# EAGLE board Proiect-Open-Book (EAGLE 9.7.0)
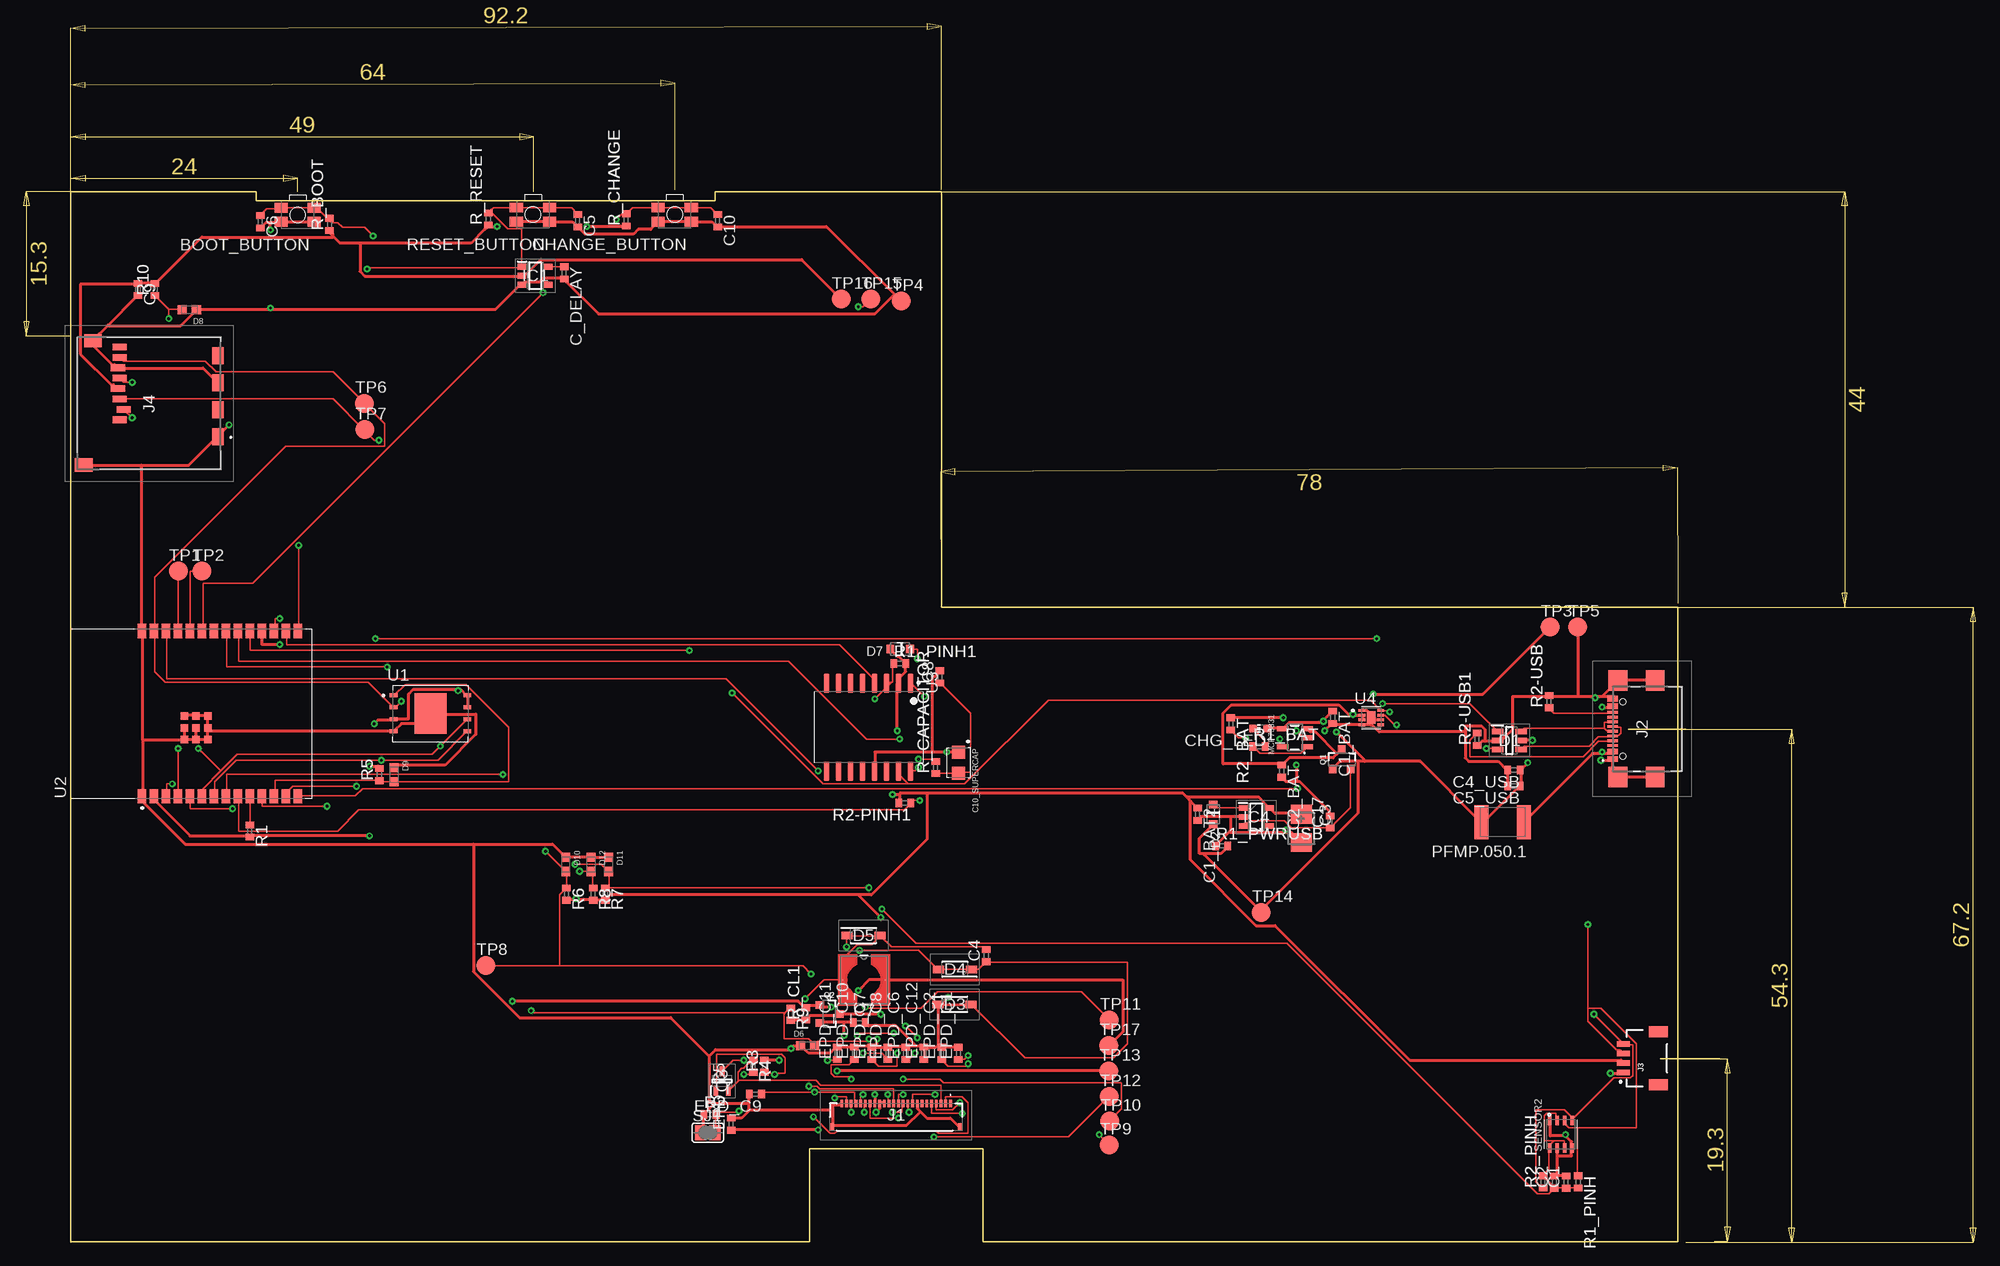
[diagram p0: board, top side]
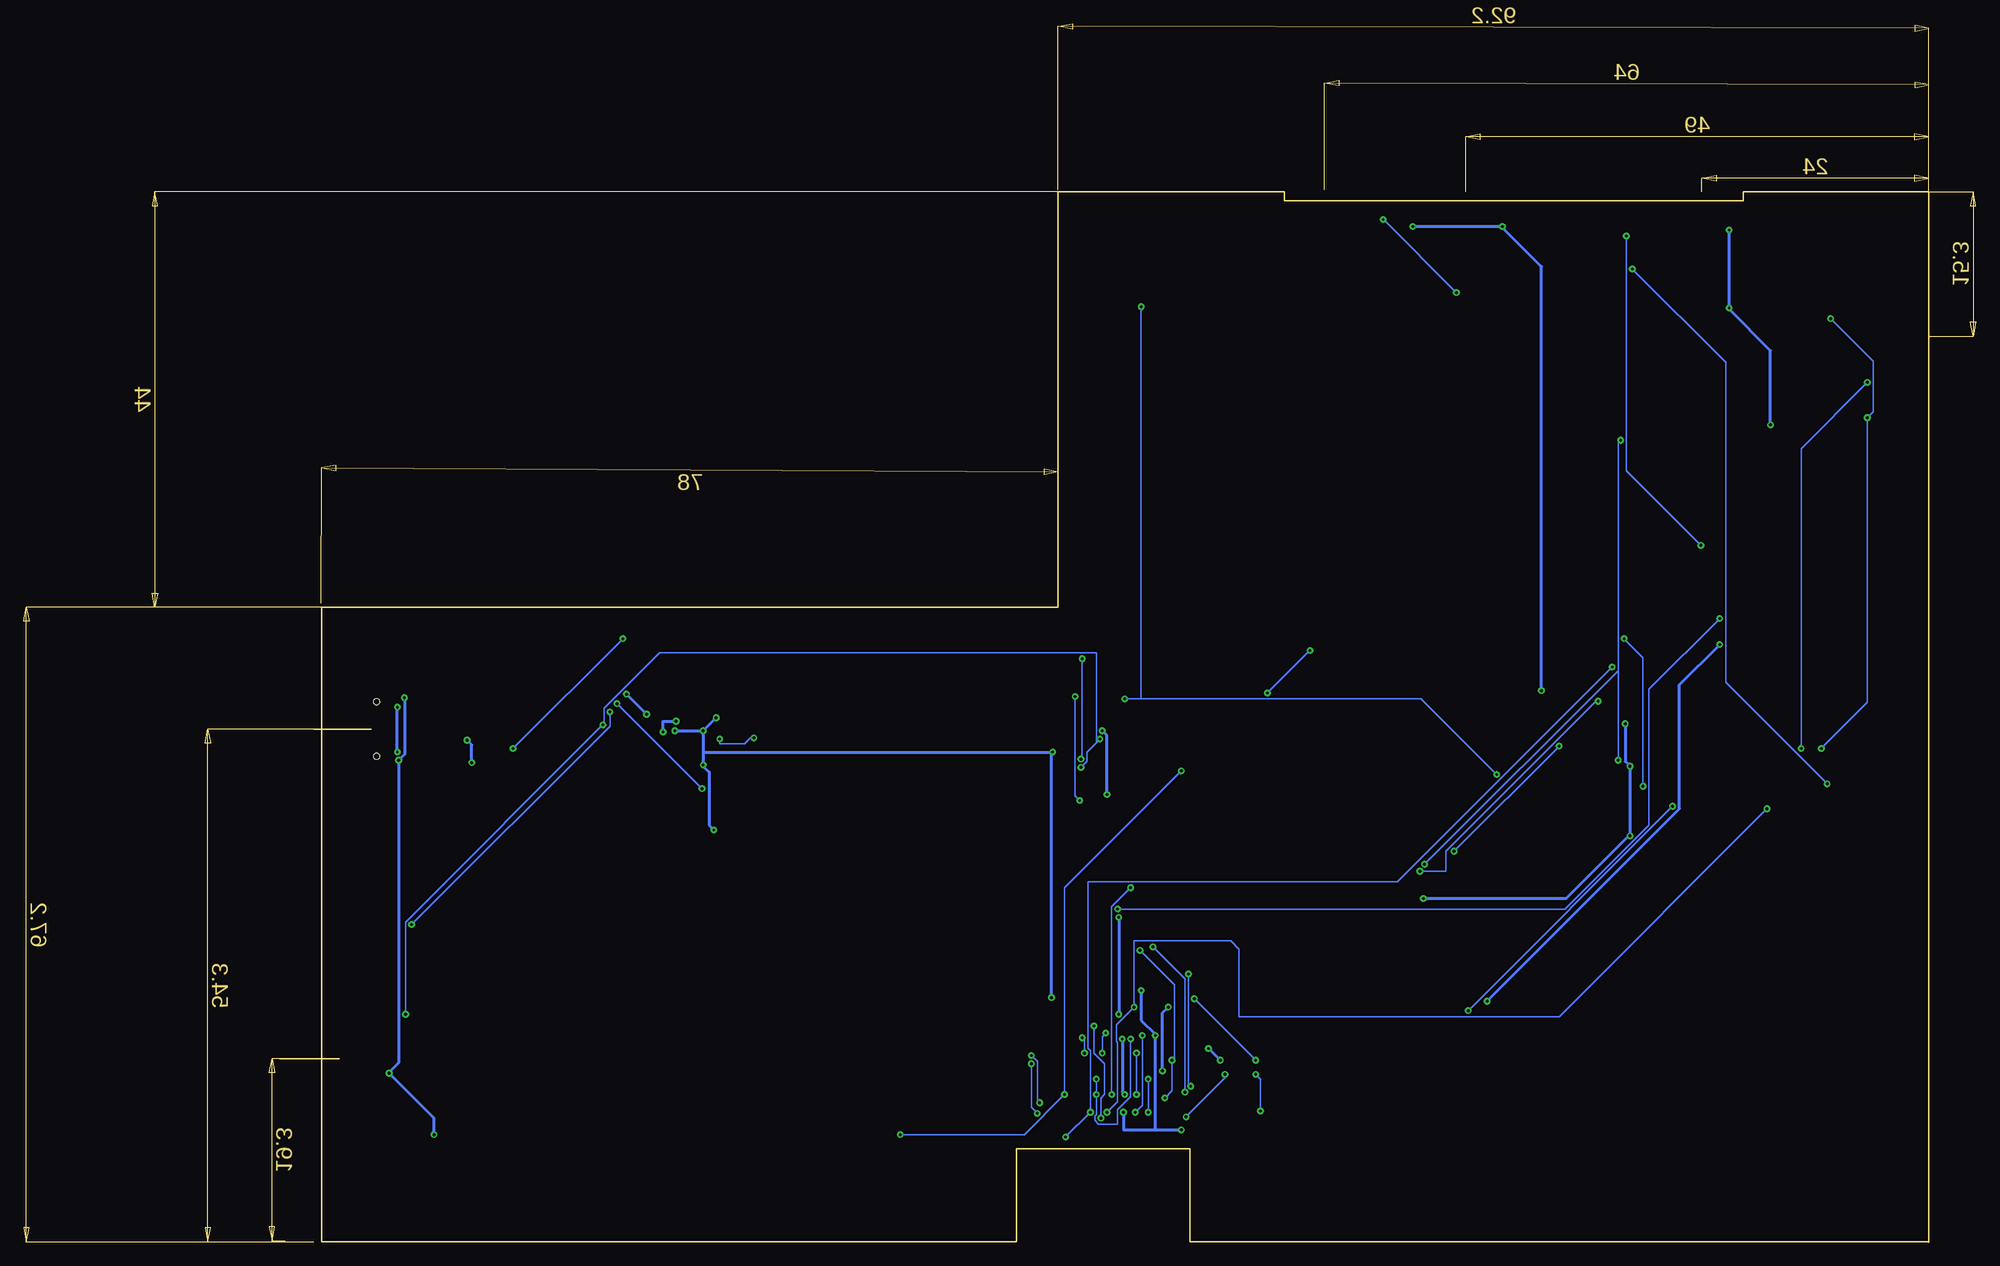
[diagram p1: board, bottom side, seen from below]

Size 174.6 x 111.2 mm. Coordinates in mm from the lower left corner, seen from the top.
Outline: 171,54.3 164.9,54.3
Outline: 174.6,19.4 168.3,19.4
Outline: 0,0 0,111.2 19.6,111.2 19.6,110.2 68.2,110.2 68.2,111.2 92.2,111.2 92.2,67.2 170.15,67.2 170.15,0.08 170.12,0.04 96.57,0.04 96.57,9.9 78.2,9.9 78.2,0.04 0.04,0.04 0,0
Copper layers (1*16): Top 0.035mm / dielectric 1.5mm / Bottom 0.035mm
Design rules "Fusion Electronics Design Rules *": minimum track width 6mil, minimum drill 0.3mm, track to track 6mil, track to pad 6mil, pad to pad 6mil, via to via 6mil, smd to smd 6mil, copper to edge 0.5mm, drill to drill 0.1mm, minimum pad ring 10mil, minimum via ring 8mil, stop-mask expansion 4mil, vias tented up to drill 0mil, thermal gap 10mil
Net classes: 0 default: width 0.15 mm; 1 Trasee Alimentare: width 0.3 mm

## Footprints (pad centres in the part's own frame; a part is rotated, then mirrored left to right if it is on the bottom)
MYBUTTON = smd 1.4 x 1.05: 1 1.75,0.75; 2 -1.75,0.75; 3 -1.75,-0.75; 4 1.75,-0.75
EAGLE-LTSPICE_C0402 = smd 0.7 x 0.9: 1 -0.65,0; 2 0.65,0
RCL_CT3528 = smd 2 x 2.2: + -1.5,0; - 1.5,0
CAPCP3225X100N = smd 1.4 x 1.4: 1 -1.1,0; 2 1.1,0
ADAFRUIT_CHIP-LED0603 = smd 0.8 x 0.8: A 0,-0.75; C 0,0.75
SOT95P280X145-6N = smd 1.2 x 0.6: 1 -1.25,0.95; 2 -1.25,0; 3 -1.25,-0.95; 4 1.25,-0.95; 5 1.25,0; 6 1.25,0.95
ESP32_WROVER_AVX---SD0805S020S1R0_AVX_SD0805S020S1R0_0 = smd 0.8 x 0.9: 1 -1.05,0; 2 1.05,0
SOD3716X135N = smd 1.15 x 0.8: 1 -1.75,0; 2 1.75,0
DIOC1608X36N = smd 0.97 x 0.94: 1 -0.75,0; 2 0.75,0
SOT95P280X125-5N = smd 0.9 x 0.6: 1 -1.4,0.95; 2 -1.4,0; 3 -1.4,-0.95; 4 1.4,-0.95; 5 1.4,0.95
SOT95P280X120-5N = smd 0.9 x 0.6: 1 -1.4,0.95; 2 -1.4,0; 3 -1.4,-0.95; 4 1.4,-0.95; 5 1.4,0.95
FH34SRJ24S05SH99 = smd 0.3 x 0.8: 1 5.75,1.45; 2 5.25,1.45; 3 4.75,1.45; 4 4.25,1.45; 5 3.75,1.45; 6 3.25,1.45; 7 2.75,1.45; 8 2.25,1.45; 9 1.75,1.45; 10 1.25,1.45; 11 0.75,1.45; 12 0.25,1.45; 13 -0.25,1.45; 14 -0.75,1.45; 15 -1.25,1.45; 16 -1.75,1.45; 17 -2.25,1.45; 18 -2.75,1.45; 19 -3.25,1.45; 20 -3.75,1.45; 21 -4.25,1.45; 22 -4.75,1.45; 23 -5.25,1.45; 24 -5.75,1.45 | smd 0.4 x 0.8: MP1 6.75,-1.05; MP2 -6.75,-1.05
SAMACSYS_PARTS_USB4110GFA = smd 0.3 x 1.15: A1 -3.35,3.678; A4 -2.55,3.678; A5 -1.25,3.678; A6 -0.25,3.678; A7 0.25,3.678; A8 1.25,3.678; A9 2.55,3.678; A12 3.35,3.678; B1 3.05,3.678; B4 2.25,3.678; B5 1.75,3.678; B6 0.75,3.678; B7 -0.75,3.678; B8 -1.75,3.678; B9 -2.25,3.678; B12 -3.05,3.678 | smd 2.18 x 2: MP1 -5.11,-0.827; MP2 5.11,-0.827; MP3 -5.11,3.103; MP4 5.11,3.103 | hole 0.65: -2.89,2.603; 2.89,2.603
JST04_1MM_RA = smd 0.6 x 1.35: 1 -1.5,0; 2 -0.5,0; 3 0.5,0; 4 1.5,0 | smd 1.2 x 2: NC1 2.8,-3.675; NC2 -2.8,-3.675
112ATAARR03ATTEND = smd 1.8 x 1.2: G1 10.6,10.4; G2 4.9,10.4; S1 7.75,10.4; S2 2.05,10.4 | smd 1.4 x 1.9: G3 13.6,-3.85; G4 0.45,-2.85 | smd 0.7 x 1.5: P1 8.8,0; P2 7.7,0.4; P3 6.6,0; P4 5.5,-0.2; P5 4.4,0; P6 3.3,-0.2; P7 2.2,0; P8 1.1,0
IND_4828-WE-TPC_WRE = smd 0.127 x 0.127: 1 -2.286,0; 2 2.286,0
ESP32_WROVER_SPARKFUN-IC-POWER_SOT23-5 = smd 0.55 x 1.2: 1 -0.95,-1.3; 2 0,-1.3; 3 0.95,-1.3; 4 0.95,1.3; 5 -0.95,1.3
ESP32C6_VARISTOR_CT/CN1812 = smd 1.5 x 3.6: 1 -2.25,0; 2 2.25,0
ESP32_WROVER_SPARKFUN-DISCRETESEMI_SOT23-3 = smd 0.8 x 0.9: 1 -0.95,-1; 2 0.95,-1; 3 0,1.1
SOT65P210X110-3N = smd 1.05 x 0.5: 1 -1.05,0.65; 2 -1.05,-0.65; 3 1.05,0
ESP32_WROVER_EAGLE-LTSPICE_R0402 = smd 0.7 x 0.9: 1 -0.65,0; 2 0.65,0
ESP32_WROVER_BME680_PSON80P300X300X100-8N = smd 1.016 x 0.5: 1 1.458,1.2; 2 1.458,0.4; 3 1.458,-0.4; 4 1.458,-1.2; 5 -1.458,-1.22; 6 -1.458,-0.4; 7 -1.458,0.4; 8 -1.458,1.2
SJ = smd 1.168 x 1.6: 1 -0.762,0; 2 0.762,0
TP20R = smd 2 x 2: TP 0,0
SON127P600X800X80-9N = smd 0.94 x 0.44: 1 -3.895,1.905; 2 -3.895,0.635; 3 -3.895,-0.635; 4 -3.895,-1.905; 5 3.895,-1.905; 6 3.895,-0.635; 7 3.895,0.635; 8 3.895,1.905 | smd 3.4 x 4.3: 9 0,0
XCVR_ESP32-C6-WROOM-1-N8 = smd 1.5 x 0.9: 1 -8.75,5.26; 2 -8.75,3.99; 3 -8.75,2.72; 4 -8.75,1.45; 5 -8.75,0.18; 6 -8.75,-1.09; 7 -8.75,-2.36; 8 -8.75,-3.63; 9 -8.75,-4.9; 10 -8.75,-6.17; 11 -8.75,-7.44; 12 -8.75,-8.71; 13 -8.75,-9.98; 14 -8.75,-11.25; 15 8.75,-11.25; 16 8.75,-9.98; 17 8.75,-8.71; 18 8.75,-7.44; 19 8.75,-6.17; 20 8.75,-4.9; 21 8.75,-3.63; 22 8.75,-2.36; 23 8.75,-1.09; 24 8.75,0.18; 25 8.75,1.45; 26 8.75,2.72; 27 8.75,3.99; 28 8.75,5.26 | smd 0.8 x 0.8: 29_1 -2.755,0.79; 29_2 -1.505,0.79; 29_3 -0.255,0.79; 29_4 -2.755,-0.46; 29_5 -1.505,-0.46; 29_6 -0.255,-0.46; 29_7 -2.755,-1.71; 29_8 -1.505,-1.71; 29_9 -0.255,-1.71
SOIC127P1032X265-16N = smd 2.05 x 0.59: 1 -4.655,4.445; 2 -4.655,3.175; 3 -4.655,1.905; 4 -4.655,0.635; 5 -4.655,-0.635; 6 -4.655,-1.905; 7 -4.655,-3.175; 8 -4.655,-4.445; 9 4.655,-4.445; 10 4.655,-3.175; 11 4.655,-1.905; 12 4.655,-0.635; 13 4.655,0.635; 14 4.655,1.905; 15 4.655,3.175; 16 4.655,4.445
SON50P200X200X80-9N = smd 0.76 x 0.27: 1 -0.985,0.75; 2 -0.985,0.25; 3 -0.985,-0.25; 4 -0.985,-0.75; 5 0.985,-0.75; 6 0.985,-0.25; 7 0.985,0.25; 8 0.985,0.75 | smd 0.9 x 1.3: 9 0,0

## Placement (x,y rotation side)
BOOT_BUTTON  BUTTON_CUSYOMV1  [MYBUTTON]  24.02,108.73 180 top
C1  100nF  [EAGLE-LTSPICE_C0402]  158.29,6.35 90 top
C1_BAT  4.7uF  [EAGLE-LTSPICE_C0402]  133.59,55.55 270 top
C1_BAT2  4.7uF  [EAGLE-LTSPICE_C0402]  119.29,45.29 270 top
C2  100nF  [EAGLE-LTSPICE_C0402]  157.07,6.35 90 top
C2_BAT  4.7uF  [EAGLE-LTSPICE_C0402]  128.2,49.85 270 top
C3  100uF  [RCL_CT3528]  130.29,43.8 270 top
C4  4.7uF  [EAGLE-LTSPICE_C0402]  96.93,30.33 90 top
C4_USB  [EAGLE-LTSPICE_C0402]  152.78,49.97 180 top
C5  1uF  [EAGLE-LTSPICE_C0402]  53.66,108.11 270 top
C5_USB  [EAGLE-LTSPICE_C0402]  152.79,48.27 180 top
C6  100nF  [EAGLE-LTSPICE_C0402]  20.05,108.01 270 top
C7  10uF  [EAGLE-LTSPICE_C0402]  83.48,23.23 0 top
C8  100nF  [EAGLE-LTSPICE_C0402]  92.02,59.83 90 top
C9  100nF  [EAGLE-LTSPICE_C0402]  7.1,100.83 270 top
C10  100nF  [EAGLE-LTSPICE_C0402]  68.48,108.11 270 top
C10_SUPERCAP  CPH3225A  [CAPCP3225X100N]  93.99,50.74 270 top
C17  [EAGLE-LTSPICE_C0402]  133.31,44.47 90 top
C_DELAY  100nF  [EAGLE-LTSPICE_C0402]  52.23,102.59 270 top
CHANGE_BUTTON  BUTTON_CUSYOMV1  [MYBUTTON]  63.94,108.76 180 top
CHG_LED  [ADAFRUIT_CHIP-LED0603]  125.94,54.35 90 top
D1  USBLC6-2SC6Y  [SOT95P280X145-6N]  152.3,53.09 0 top
D2  ESP32_WROVER_AVX---SD0805S020S1R0_AVX_SD0805S020S1R0_0_0AVX_SD0805S020S1R0_0_0  [ESP32_WROVER_AVX---SD0805S020S1R0_AVX_SD0805S020S1R0_0]  120.95,45.28 270 top
D3  MBR0530  [SOD3716X135N]  93.56,25.17 0 top
D4  MBR0530  [SOD3716X135N]  93.6,28.87 180 top
D5  MBR0530  [SOD3716X135N]  83.92,32.45 0 top
D6  PGB1010603MR  [DIOC1608X36N]  78,20.79 0 top
D7  ESP32_WROVER_AVX---SD0805S020S1R0_AVX_SD0805S020S1R0_0_0AVX_SD0805S020S1R0_0_0  [ESP32_WROVER_AVX---SD0805S020S1R0_AVX_SD0805S020S1R0_0]  87.8,62.78 180 top
D8  PGB1010603MR  [DIOC1608X36N]  12.55,98.67 180 top
D9  PGB1010603MR  [DIOC1608X36N]  34.23,49.47 270 top
D10  PGB1010603MR  [DIOC1608X36N]  52.41,39.97 270 top
D11  PGB1010603MR  [DIOC1608X36N]  56.93,39.97 270 top
D12  PGB1010603MR  [DIOC1608X36N]  55.07,39.97 270 top
EPD_C1  1uF/50V  [EAGLE-LTSPICE_C0402]  93.98,19.97 90 top
EPD_C2  1uF/50V  [EAGLE-LTSPICE_C0402]  92.19,19.97 90 top
EPD_C5  0.1uF/50V  [EAGLE-LTSPICE_C0402]  69.91,12.49 90 top
EPD_C6  1uF/50V  [EAGLE-LTSPICE_C0402]  88.4,19.97 90 top
EPD_C7  1uF/50V  [EAGLE-LTSPICE_C0402]  84.81,19.97 90 top
EPD_C8  1uF/50V  [EAGLE-LTSPICE_C0402]  86.52,19.97 90 top
EPD_C9  1uF/50V  [EAGLE-LTSPICE_C0402]  72.48,15.65 180 top
EPD_C10  1uF/50V  [EAGLE-LTSPICE_C0402]  82.97,19.99 90 top
EPD_C11  1uF/50V  [EAGLE-LTSPICE_C0402]  81.15,19.99 90 top
EPD_C12  1uF/50V  [EAGLE-LTSPICE_C0402]  90.31,19.99 90 top
IC1  BD5229G-TR  [SOT95P280X125-5N]  49.17,102.29 0 top
IC4  XC6220A331MR-G  [SOT95P280X120-5N]  125.51,44.99 0 top
J1  FH34SRJ-24S-0.5SH_99_  [FH34SRJ24S05SH99]  87.37,13.24 0 top
J2  SAMACSYS_PARTS_USB4110-GF-A  [SAMACSYS_PARTS_USB4110GFA]  166.91,54.32 90 top
J3  QWIIC_RIGHT_ANGLE  [JST04_1MM_RA]  164.39,19.46 90 top
J4  112A-TAAR-R03_ATTEND  [112ATAARR03ATTEND]  5.19,95.85 270 top
L1  68uH  [IND_4828-WE-TPC_WRE]  83.97,27.75 0 top
MCP73831  ESP32_WROVER_SPARKFUN-IC-POWER_MCP73831  [ESP32_WROVER_SPARKFUN-IC-POWER_SOT23-5]  129.59,53.39 90 top
PFMP.050.1  ESP32C6_VARISTORCN1812  [ESP32C6_VARISTOR_CT/CN1812]  151.6,44.46 180 top
Q1  20V/4.2A/52mΩ/1.4W  [ESP32_WROVER_SPARKFUN-DISCRETESEMI_SOT23-3]  134.56,51.06 0 top
Q2  20V/4.2A/52mΩ/1.4W  [ESP32_WROVER_SPARKFUN-DISCRETESEMI_SOT23-3]  80.28,24.16 270 top
Q3  SI1308EDL-T1-GE3  [SOT65P210X110-3N]  68.95,17.05 90 top
R1  2K  [ESP32_WROVER_EAGLE-LTSPICE_R0402]  18.95,43.51 270 top
R1_BAT  200  [ESP32_WROVER_EAGLE-LTSPICE_R0402]  125.81,52.45 0 top
R1_PINH  10K  [ESP32_WROVER_EAGLE-LTSPICE_R0402]  159.58,6.37 270 top
R1_PINH1  10K  [ESP32_WROVER_EAGLE-LTSPICE_R0402]  87.76,61.24 0 top
R1_PWRUSB  100K  [ESP32_WROVER_EAGLE-LTSPICE_R0402]  121.85,41.94 0 top
R2  2.2  [ESP32_WROVER_EAGLE-LTSPICE_R0402]  67.66,13.51 0 top
R2-PINH1  10K  [ESP32_WROVER_EAGLE-LTSPICE_R0402]  88.29,46.49 180 top
R2-USB  5k1  [ESP32_WROVER_EAGLE-LTSPICE_R0402]  156.49,57.21 90 top
R2-USB1  5K1  [ESP32_WROVER_EAGLE-LTSPICE_R0402]  148.88,53.23 90 top
R2_BAT  2K  [ESP32_WROVER_EAGLE-LTSPICE_R0402]  122.82,54.85 270 top
R2_PINH  10K  [ESP32_WROVER_EAGLE-LTSPICE_R0402]  155.86,6.37 90 top
R3  10K  [ESP32_WROVER_EAGLE-LTSPICE_R0402]  73.44,18.63 90 top
R4  0.47  [ESP32_WROVER_EAGLE-LTSPICE_R0402]  72.24,18.63 270 top
R5  10K  [ESP32_WROVER_EAGLE-LTSPICE_R0402]  32.66,49.48 90 top
R6  10K  [ESP32_WROVER_EAGLE-LTSPICE_R0402]  52.48,36.83 270 top
R7  10K  [ESP32_WROVER_EAGLE-LTSPICE_R0402]  56.6,36.83 270 top
R8  10K  [ESP32_WROVER_EAGLE-LTSPICE_R0402]  55.3,36.83 270 top
R9  10K  [ESP32_WROVER_EAGLE-LTSPICE_R0402]  76.21,24.13 270 top
R10  10K  [ESP32_WROVER_EAGLE-LTSPICE_R0402]  8.92,100.83 90 top
R_BOOT  10k  [ESP32_WROVER_EAGLE-LTSPICE_R0402]  27.4,107.72 90 top
R_CAPACITOR  15  [ESP32_WROVER_EAGLE-LTSPICE_R0402]  91.55,50.24 90 top
R_CHANGE  10k  [ESP32_WROVER_EAGLE-LTSPICE_R0402]  58.8,108.2 90 top
R_CL1  10K  [ESP32_WROVER_EAGLE-LTSPICE_R0402]  77.81,24.15 90 top
R_RESET  10k  [ESP32_WROVER_EAGLE-LTSPICE_R0402]  44.2,108.3 90 top
RESET_BUTTON  BUTTON_CUSYOMV1  [MYBUTTON]  48.93,108.76 180 top
SENSOR2  ESP32_WROVER_BME680_BME680  [ESP32_WROVER_BME680_PSON80P300X300X100-8N]  157.75,11.42 90 top
SJ1  [SJ]  67.44,11.59 0 top
TP1  TPTP20R  [TP20R]  11.37,71.01 0 top
TP2  TPTP20R  [TP20R]  13.89,71.01 0 top
TP3  TPTP20R  [TP20R]  156.61,65.11 0 top
TP4  TPTP20R  [TP20R]  87.93,99.61 0 top
TP5  TPTP20R  [TP20R]  159.55,65.11 0 top
TP6  TPTP20R  [TP20R]  31.09,88.79 0 top
TP7  TPTP20R  [TP20R]  31.11,85.99 0 top
TP8  TPTP20R  [TP20R]  43.93,29.29 0 top
TP9  TPTP20R  [TP20R]  109.95,10.29 0 top
TP10  TPTP20R  [TP20R]  110,12.81 0 top
TP11  TPTP20R  [TP20R]  109.95,23.51 0 top
TP12  TPTP20R  [TP20R]  109.95,15.41 0 top
TP13  TPTP20R  [TP20R]  109.9,18.11 0 top
TP14  TPTP20R  [TP20R]  126.05,34.91 0 top
TP15  TPTP20R  [TP20R]  84.7,99.81 0 top
TP16  TPTP20R  [TP20R]  81.55,99.81 0 top
TP17  TPTP20R  [TP20R]  109.9,20.81 0 top
U1  W25Q512JVEIQ  [SON127P600X800X80-9N]  38.09,55.96 0 top
U2  ESP32-C6-WROOM-1-N8  [XCVR_ESP32-C6-WROOM-1-N8]  12.8,55.94 90 top
U3  DS3231SN#  [SOIC127P1032X265-16N]  84.45,54.5 270 top
U4  MAX17048G+T10  [SON50P200X200X80-9N]  137.68,55.52 0 top

## Library data of the parts
BOOT_BUTTON C1 C1_BAT C1_BAT2 C2 C2_BAT C4 C4_USB C5 C5_USB C6-C10 C17 C_DELAY CHANGE_BUTTON CHG_LED D3-D6 D8-D12 EPD_C1 EPD_C2 EPD_C5-EPD_C12 PFMP.050.1 R1 R1_BAT R1_PINH R1_PINH1 R1_PWRUSB R2 R2-PINH1 R2-USB R2-USB1 R2_BAT R2_PINH R3-R10 R_BOOT R_CAPACITOR R_CHANGE R_CL1 R_RESET RESET_BUTTON SJ1 TP1-TP17 = DeskAssistant v19 v1
C3 = DeskAssistant v19 v1; SPICEPREFIX: C
C10_SUPERCAP = DeskAssistant v19 v1; AVAILABILITY: Not in stock; CHECK_PRICES: https://www.snapeda.com/parts/CPH3225A/Seiko+Instruments/view-part/?ref=eda; DESCRIPTION: 11 mF (EDLC) Supercapacitor 3.3 V 1210 (3225 Metric) - -; MF: Seiko Instruments; MP: CPH3225A; PACKAGE: 1210 Seiko; PRICE: None; PURCHASE-URL: https://www.snapeda.com/api/url_track_click_mouser/?unipart_id=562593&manufacturer=Seiko Instruments&part_name=CPH3225A&search_term=None; SNAPEDA_LINK: https://www.snapeda.com/parts/CPH3225A/Seiko+Instruments/view-part/?ref=snap
D1 = DeskAssistant v19 v1; AVAILABILITY: In Stock; CHECK_PRICES: https://www.snapeda.com/parts/USBLC6-2SC6Y/STMicroelectronics/view-part/?ref=eda; DESCRIPTION: 17V Clamp 5A (8/20µs) Ipp Tvs Diode Surface Mount SOT-23-6; MF: STMicroelectronics; MP: USBLC6-2SC6Y; PACKAGE: SOT-23-6 STMicroelectronics; PRICE: None; SNAPEDA_LINK: https://www.snapeda.com/parts/USBLC6-2SC6Y/STMicroelectronics/view-part/?ref=snap
D2 D7 = DeskAssistant v19 v1; CENTROID_NOT_SPECIFIED: No; DATASHEET: http://datasheets.avx.com/schottky.pdf; DIGIKEY_DESCRIPTION: DIODE SCHOTTKY 20V 1A 0805; DIGIKEY_PART_NUMBER: 478-7800-1-ND; LEAD_FREE: yes; MF: AVX; MOUSER_PART_NUMBER: 581-SD0805S020S1R0; PACKAGE: 0805 (2012 metric); PREFIX: D; ROHS: yes; TEMPERATURE_RANGE_HIGH: +125°C; TEMPERATURE_RANGE_LOW: -55°C
IC1 = DeskAssistant v19 v1; DESCRIPTION: Voltage Detector with Adjustable Delay Time: CMOS processes are utilized to develop high precision, low current consumption CMOS reset ICs that allow arbitrary setting of the delay time. The extensive lineup includes both Nch Open Drain and CMOS output types in a wide range of detection voltages (from 2.3V to 6.0V, in 0.1V steps), enabling selection of the ideal solution based on customer requirements. In addition, the entire series is of course both lead-free and RoHS-compliant.; HEIGHT: 1.25mm; MANUFACTURER_NAME: ROHM Semiconductor; MANUFACTURER_PART_NUMBER: BD5229G-TR; MOUSER_PART_NUMBER: 755-BD5229G-TR; MOUSER_PRICE-STOCK: https://www.mouser.co.uk/ProductDetail/ROHM-Semiconductor/BD5229G-TR?qs=4kLU8WoGk0vvnhrrYwdszw%3D%3D
IC4 = DeskAssistant v19 v1; DESCRIPTION: LDO Voltage Regulators; HEIGHT: 1.2mm; MANUFACTURER_NAME: Torex; MANUFACTURER_PART_NUMBER: XC6220A331MR-G; MOUSER_PART_NUMBER: 865-XC6220A331MR-G; MOUSER_PRICE-STOCK: https://www.mouser.co.uk/ProductDetail/Torex-Semiconductor/XC6220A331MR-G?qs=AsjdqWjXhJ8ZSWznL1J0gg%3D%3D
J1 = DeskAssistant v19 v1; DESCRIPTION: 24 Position FFC, FPC Connector Contacts, Top and Bottom 0.020" (0.50mm) Surface Mount, Right Angle; HEIGHT: 1.1mm; MANUFACTURER_NAME: Hirose; MANUFACTURER_PART_NUMBER: FH34SRJ-24S-0.5SH(99); MOUSER_PART_NUMBER: 798-FH34SRJ24S05SH99; MOUSER_PRICE-STOCK: https://www.mouser.co.uk/ProductDetail/Hirose-Connector/FH34SRJ-24S-0.5SH99?qs=vcbW%252B4%252BSTIpKBl5ap9J8Fw%3D%3D
J2 = DeskAssistant v19 v1; DESCRIPTION: CONN USB 2.0 TYPE-C R/A SMT; HEIGHT: 3.26mm; MANUFACTURER_NAME: GCT (GLOBAL CONNECTOR TECHNOLOGY); MANUFACTURER_PART_NUMBER: USB4110-GF-A; MOUSER_PART_NUMBER: 640-USB4110-GF-A; MOUSER_PRICE-STOCK: https://www.mouser.co.uk/ProductDetail/GCT/USB4110-GF-A?qs=KUoIvG%2F9IlYiZvIXQjyJeA%3D%3D
J3 = DeskAssistant v19 v1; PROD_ID: CONN-13694
J4 = DeskAssistant v19 v1; DESCRIPTION: Micro SD Card Socket, Push-Push Type, Top Mount, SMT, H=1.83mm, 10u; HEIGHT: 1.9mm; MANUFACTURER_NAME: ATTEND; MANUFACTURER_PART_NUMBER: 112A-TAAR-R03 ATTEND
L1 = DeskAssistant v19 v1; COPYRIGHT: Copyright (C) 2024 Ultra Librarian. All rights reserved.; MANUFACTURER_PART_NUMBER: 744043680; MFR_NAME: Wurth Electronics
MCP73831 = DeskAssistant v19 v1; PROD_ID: IC-09995
Q1 Q2 = DeskAssistant v19 v1; PROD_ID: TRAN-14388
Q3 = DeskAssistant v19 v1; AVAILABILITY: In Stock; CHECK_PRICES: https://www.snapeda.com/parts/SI1308EDL-T1-GE3/Vishay+Siliconix/view-part/?ref=eda; DESCRIPTION: Si1308EDL-T1-GE3 N-channel MOSFET Transistor, 1.5 A, 30 V, 3-Pin SC-70 | Siliconix / Vishay SI1308EDL-T1-GE3; MF: Vishay Siliconix; MP: SI1308EDL-T1-GE3; PACKAGE: SOT-323 Vishay Semiconductor; PRICE: None; PURCHASE-URL: https://www.snapeda.com/api/url_track_click_mouser/?unipart_id=274603&manufacturer=Vishay Siliconix&part_name=SI1308EDL-T1-GE3&search_term=None; SNAPEDA_LINK: https://www.snapeda.com/parts/SI1308EDL-T1-GE3/Vishay+Siliconix/view-part/?ref=snap
SENSOR2 = DeskAssistant v19 v1; AVAILABILITY: Unavailable; DESCRIPTION: Integrated Environmental Unit; MF: Bosch Sensortec; MP: BME680; PACKAGE: LGA-8 Bosch Tools; PRICE: None
U1 = DeskAssistant v19 v1; AVAILABILITY: In Stock; CHECK_PRICES: https://www.snapeda.com/parts/W25Q512JVEIQ/Winbond+Electronics/view-part/?ref=eda; DESCRIPTION: FLASH - NOR Memory IC 512Mb (64M x 8) SPI - Quad I/O 133 MHz 8-WSON (8x6); MF: Winbond Electronics; MP: W25Q512JVEIQ; PACKAGE: Package; PRICE: None; SNAPEDA_LINK: https://www.snapeda.com/parts/W25Q512JVEIQ/Winbond+Electronics/view-part/?ref=snap
U2 = DeskAssistant v19 v1; AVAILABILITY: In Stock; CHECK_PRICES: https://www.snapeda.com/parts/ESP32-C6-WROOM-1-N8/Espressif+Systems/view-part/?ref=eda; DESCRIPTION: Multiprotocol Modules ESP32-C6 module, Wi-Fi 6 in 2.4 GHz band, Bluetooth 5, Zigbee 3.0 and Thread. ESP34-WROOM Compatible - ENGINEERING SAMPLE; MF: Espressif Systems; MP: ESP32-C6-WROOM-1-N8; PACKAGE: None; PRICE: None; SNAPEDA_LINK: https://www.snapeda.com/parts/ESP32-C6-WROOM-1-N8/Espressif+Systems/view-part/?ref=snap
U3 = DeskAssistant v19 v1; AVAILABILITY: In Stock; CHECK_PRICES: https://www.snapeda.com/parts/DS3231SN%23/Analog+Devices/view-part/?ref=eda; DESCRIPTION: Extremely Accurate I²C-Integrated RTC/TCXO/Crystal; MF: Analog Devices; MP: DS3231SN#; PACKAGE: SOIC-16 Maxim; PRICE: None; PURCHASE-URL: https://www.snapeda.com/api/url_track_click_mouser/?unipart_id=99048&manufacturer=Analog Devices&part_name=DS3231SN#&search_term=None; SNAPEDA_LINK: https://www.snapeda.com/parts/DS3231SN%23/Analog+Devices/view-part/?ref=snap
U4 = DeskAssistant v19 v1; AVAILABILITY: In Stock; CHECK_PRICES: https://www.snapeda.com/parts/MAX17048G+T10/Analog+Devices/view-part/?ref=eda; DESCRIPTION: 3µA 1-Cell/2-Cell Fuel Gauge with ModelGauge; MF: Analog Devices; MP: MAX17048G+T10; PACKAGE: TDFN-8 Maxim; PRICE: None; PURCHASE-URL: https://www.snapeda.com/api/url_track_click_mouser/?unipart_id=329239&manufacturer=Analog Devices&part_name=MAX17048G+T10&search_term=None; SNAPEDA_LINK: https://www.snapeda.com/parts/MAX17048G+T10/Analog+Devices/view-part/?ref=snap

## Nets
3V3 [Trasee Alimentare]: C1_BAT2.1 C3.+ C9.1 D7.2 IC1.2 IC4.5 J3.2 J4.P4 Q2.3 R1.2 R1_PINH1.2 R2-PINH1.2 R5.2 R6.2 R7.2 R8.2 R9.2 R10.2 R_BOOT.1 R_CHANGE.1 R_CL1.1 R_RESET.1 TP16.TP U1.3 U1.7 U1.8 U2.2 U3.2
32KHZ: R2-PINH1.1 U2.9 U3.1
DN: D1.4 J2.A7 J2.B7
DP: D1.6 J2.A6 J2.B6
EPD_3V3 [Trasee Alimentare]: C7.1 EPD_C5.1 J1.15 J1.16 L1.2 Q2.2 TP17.TP
EPD_3V3_C [Trasee Alimentare]: Q2.1 R_CL1.2 TP13.TP U2.18
EPD_BUSY: J1.9 TP9.TP U2.26
EPD_CS: D6.2 J1.12 R9.1 TP10.TP U2.11
EPD_DC: J1.11 TP11.TP U2.5
EPD_RST: J1.10 TP12.TP U2.21
FLASH_CS: D9.2 R5.1 U1.1 U2.12
GDR: J1.2 Q3.1 R3.1
GND [Trasee Alimentare]: BOOT_BUTTON.1 BOOT_BUTTON.2 C1.2 C1_BAT2.2 C1_BAT.2 C2.2 C2_BAT.2 C3.- C4_USB.2 C5.2 C5_USB.2 C6.2 C7.2 C8.2 C9.2 C10.2 C10_SUPERCAP.1 C17.2 C_DELAY.2 CHANGE_BUTTON.1 CHANGE_BUTTON.2 D1.2 D3.2 D6.1 D8.1 D9.1 D10.1 D11.1 D12.1 EPD_C1.2 EPD_C2.2 EPD_C5.2 EPD_C6.2 EPD_C7.2 EPD_C8.2 EPD_C9.2 EPD_C10.2 EPD_C11.2 EPD_C12.1 EPD_C12.2 IC1.3 IC4.2 J1.8 J1.17 J1.24 J1.MP1 J1.MP2 J2.A1 J2.A12 J2.B1 J2.B12 J2.MP1 J2.MP2 J2.MP3 J2.MP4 J3.1 J4.G1 J4.G2 J4.G3 J4.G4 J4.P6 MCP73831.2 R1_PWRUSB.1 R2-USB1.1 R2-USB.2 R2.1 R2_BAT.1 R3.2 RESET_BUTTON.1 RESET_BUTTON.2 SENSOR2.1 SENSOR2.5 SENSOR2.7 SJ1.1 TP4.TP TP5.TP U1.4 U1.9 U2.1 U2.28 U2.29_1 U2.29_2 U2.29_3 U2.29_4 U2.29_5 U2.29_6 U2.29_7 U2.29_8 U2.29_9 U3.13 U4.1 U4.4 U4.6 U4.9
GPIO8: R1.1 U2.10
I2C_PW: C1.1 C2.1 R1_PINH.2 R2_PINH.2 SENSOR2.2 SENSOR2.6 SENSOR2.8 U2.17
INT_RTC: R1_PINH1.1 TP15.TP U2.8 U3.3
IO/BOOT: BOOT_BUTTON.3 BOOT_BUTTON.4 C6.1 R_BOOT.2 U2.15
IO/CHANGE: C10.1 CHANGE_BUTTON.3 CHANGE_BUTTON.4 R_CHANGE.2 U2.23
MISO: D12.2 J4.P7 R8.1 TP6.TP U1.2 U2.27
MOSI: D11.2 J1.14 J4.P3 R7.1 TP7.TP U1.5 U2.7
N$1: J2.B5 R2-USB.1
N$3: J2.A5 R2-USB1.2
N$4: C17.1 D2.1 IC4.1 IC4.3 Q1.2
N$5: MCP73831.1 R1_BAT.1
N$6: CHG_LED.C R1_BAT.2
N$7: C4.1 D3.1 D4.2
N$8: EPD_C6.1 J1.18
N$9: MCP73831.5 R2_BAT.2
N$10: EPD_C1.1 J1.4
N$11: EPD_C2.1 J1.5
N$12: C_DELAY.1 IC1.5
N$13: EPD_C7.1 J1.19
N$14: EPD_C8.1 J1.20
N$15: EPD_C10.1 J1.22
N$16: D7.1 R_CAPACITOR.2
N$17: C8.1 C10_SUPERCAP.2 R_CAPACITOR.1
PREVGH: D5.2 EPD_C9.1 J1.21
PREVGL: D4.1 EPD_C11.1 J1.23
RESE: J1.3 Q3.2 R4.1
RESE': R2.2 R4.2 SJ1.2
RESET: C5.1 IC1.1 R_RESET.2 RESET_BUTTON.3 RESET_BUTTON.4 U2.3
RTC_RST: U2.16 U3.4
RX: TP2.TP U2.24
SCK: D10.2 J1.13 J4.P5 R6.1 TP8.TP U1.6 U2.6
SCL: J3.4 R2_PINH.1 SENSOR2.4 U2.20 U3.16 U4.7
SDA: J3.3 R1_PINH.1 SENSOR2.3 U2.19 U3.15 U4.8
SRC: C4.2 D5.1 L1.1 Q3.3
SS_SD: D8.2 J4.P2 R10.1 U2.4
TX: TP1.TP U2.25
USB_D+: D1.1 U2.14
USB_D-: D1.3 U2.13
VBAT [Trasee Alimentare]: C2_BAT.1 MCP73831.3 Q1.3 TP3.TP U4.2 U4.3
VBUS [Trasee Alimentare]: C1_BAT.1 C4_USB.1 C5_USB.1 CHG_LED.A D1.5 D2.2 MCP73831.4 PFMP.050.1.2 Q1.1 R1_PWRUSB.2 TP14.TP
VRTC [Trasee Alimentare]: U3.14
VUSB [Trasee Alimentare]: J2.A4 J2.A9 J2.B4 J2.B9 PFMP.050.1.1

## Tracks (layer width: path | path; a pad name or v marks a point on that pad's centre or on a via)
3V3  (via drill 0.3)
  Top 0.3: J4.P4 4.88,90.38 4.5,90.75 4.25,90.75 1,94 1,101.38 7,101.38 C9.1 7.12,101.5 8.88,101.5 R10.2 9,101.5 13.88,106.38 27.75,106.38 27.75,106.72 R_BOOT.1 27.4,106.85 28.5,105.75 30.62,105.75 | 30.62,105.75 42.38,105.75 43.81,107.19 | 44,107.38 43.81,107.19 | 30.62,105.75 30.62,102.75 31.12,102.25 47.75,102.25 IC1.2 47.88,102.38 48.12,102.38 49.75,104 77.38,104 81.5,99.88 TP16.TP | 58.75,107.5 58.2,107.5 | 58.2,107.5 v54.62,107.5 | 44.12,107.5 44.35,107.5 | 44.35,107.5 v45.12,107.5 | U2.2 8.88,47.12 8.88,46.75 12.62,43 18.75,43 18.88,42.88 R1.2 19,43 v31.62,43 | U1.7 42,56.62 42,57.75 U1.8 41.88,57.88 41.25,58.5 41,58.5 | v31.62,50.38 32.5,50.38 32.62,50.25 R5.2 | v32.12,54.88 32.5,55.25 34.12,55.25 U1.3 34.25,55.38 35.75,55.38 35.75,58 36.25,58.5 41,58.5 | C3.+ 130.25,45.38 127.5,45.38 127,45.88 IC4.5 126.88,46 125.75,47.12 118.25,47.12 118.19,47.06 | D7.2 86.75,62.75 87.5,62 87.62,62 88.38,61.25 R1_PINH1.2 88.38,61.12 88.38,60.38 87.62,59.62 U3.2 87.5,59.12 v87.5,54.12 | R9.2 76.25,23.5 R_CL1.1 77.88,23.62 78.25,24 81.25,24 81.38,24.12 Q2.3 81.5,24.12 v85.75,24.12 | 53.5,36.25 55.25,36.25 R8.2 55.38,36.25 56.5,36.25 R7.2 56.62,36.25 57.12,36.75 83.5,36.75 | 53.5,36.25 52.5,36.25 R6.2 | 87.75,47.38 87.75,47.5 90.62,47.5 | 87.75,47.38 87.75,46.5 R2-PINH1.2 | 90.62,47.5 117.75,47.5 118.19,47.06 | 118.56,46.69 119.25,46 C1_BAT2.1 | 118.56,46.69 118.19,47.06 | J3.2 164.38,19 164.12,19.25 141.75,19.25 127.5,33.5 125.5,33.5 118.5,40.5 118.5,46.62 118.56,46.69 | 83.5,36.75 84.75,36.75 90.62,42.62 90.62,47.5 | v85.75,34.38 83.5,36.62 83.5,36.75 | 87.75,47.38 v87,47.38
  Top 0.3: v53.5,36.38 53.5,36.25 | v41,58.38 41,58.5 | 58.2,107.5 58.25,107.55 R_CHANGE.1 | 44.35,107.5 R_RESET.1 43.81,107.26 43.81,107.19
  Bottom 0.3: v54.62,107.5 v45.12,107.5 45.12,107.38 41,103.25 v41,58.38 | v32.12,54.88 32.12,50.88 v31.62,50.38 v31.62,43 31.75,43 38.38,36.38 v53.5,36.38 | v85.75,34.38 v85.75,24.12 | v87.5,54.12 87,53.62 v87,47.38
32KHZ  (via drill 0.3)
  Top 0.152: v89.88,46.75 89.25,46.75 89,46.5 R2-PINH1.1 88.88,46.38 88.25,45.75 30.5,45.75 28.25,43.5 17.75,43.5 17.75,47.12 U2.9 | v90.38,57.75 89,59.12 U3.1
  Bottom 0.152: v89.88,46.75 90.38,47.25 v90.38,57.75
DN
  Top 0.152: J2.A7 163.25,54.5 164.12,54.5 164.12,53.88 163.88,53.62 163.25,53.62 J2.B7 163.12,53.5 161.75,53.5 160.75,52.5 153.88,52.5 153.62,52.25 D1.4
DP
  Top 0.152: 162.38,54.38 162.62,54.12 163.12,54.12 J2.A6 | 162.38,54.38 162.38,55 163.12,55 J2.B6 | 162.38,54.38 153.88,54.38 153.62,54.12 D1.6
EPD_3V3  (via drill 0.3)
  Top 0.3: 81.88,23.25 82.75,23.25 C7.1 | 81.88,23.25 79.38,23.25 Q2.2 | J1.15 86,14.75 85.62,14.75 J1.16 85.62,14.62 85.62,14.12 v85.25,13.75 | v79.12,11.88 70,11.88 EPD_C5.1 | v81.88,21.88 81.88,23.25 | TP17.TP 110,20.88 111.38,22.25 111.38,27.75 L1.2 84.5,27.75 v83.38,26.62
  Bottom 0.3: 81.88,11.88 85.25,11.88 v85.25,13.75 | 81.88,11.88 v79.12,11.88 | 81.88,11.88 v81.88,21.88 81.88,22 83.38,23.5 v83.38,26.62
EPD_3V3_C  (via drill 0.3)
  Top 0.3: v80.5,24.88 79.5,24.88 79.38,25 Q2.1 79.25,25 78,25 77.88,24.88 R_CL1.2 77.75,24.88 77.62,24.88 77,25.5 v46.75,25.5 | v81.12,18.12 109.88,18.12 TP13.TP | v22.12,63.25 20.25,63.25 20.25,64.62 U2.18
  Bottom 0.3: v80.5,24.88 81.12,24.25 v81.12,18.12 | v22.12,63.25 26.38,59 26.38,45.88 v46.75,25.5
EPD_BUSY  (via drill 0.3)
  Top 0.152: v91.5,15.62 89.12,15.62 89.12,14.75 J1.9 | v108.88,11.38 109.88,10.38 TP9.TP | v79.12,49.88 69.38,59.62 10.12,59.62 10.12,64.62 U2.26
  Bottom 0.152: v108.88,11.38 95.75,11.38 v91.5,15.62 91.5,37.5 v79.12,49.88
EPD_CS  (via drill 0.3)
  Top 0.152: v88.12,15.62 87.62,15.62 87.62,14.75 J1.12 | v84.5,21.5 84.25,21.25 79.12,21.25 78.75,20.88 | 75.62,24.25 75.5,24.12 75.5,21.5 78.12,21.5 78.75,20.88 | 75.62,24.25 76.12,24.75 R9.1 | 78.75,20.88 D6.2 | v27.12,46.12 20.25,46.12 20.25,47.12 U2.11 | v48.75,24.5 49,24.25 75.62,24.25 | v88.12,17.25 92,17.25 92.38,16.88 111.25,16.88 111.25,14.12 110,12.88 TP10.TP
  Bottom 0.152: v84.5,21.5 84.5,15.38 85.88,14 85.88,12.5 87.88,12.5 88.25,12.88 88.25,13.38 88.12,13.5 v88.12,15.62 v88.12,17.25 | v48.75,24.5 v27.12,46.12
EPD_DC  (via drill 0.3)
  Top 0.152: v87,13.75 88,13.75 88,14.62 J1.11 | v84.12,24.88 84.25,24.75 90,24.75 91.75,26.5 107,26.5 109.88,23.62 TP11.TP | v17.12,45.88 12.62,45.88 12.62,47.12 U2.5
  Bottom 0.152: v87,13.75 85.88,14.88 85.88,21.12 86,21.25 86,23 v84.12,24.88 84.12,31.88 73.88,31.88 73,31 73,23.88 39.12,23.88 v17.12,45.88
EPD_RST  (via drill 0.3)
  Top 0.152: v88.75,13.75 88.62,13.75 88.62,14.62 J1.10 | v91.38,11.12 105.62,11.12 109.88,15.38 TP12.TP | v33.5,60.88 16.5,60.88 16.5,64.62 U2.21
  Bottom 0.152: v91.38,11.12 v88.75,13.75 88.75,20.25 89,20.5 89,38.12 56.25,38.12 v33.5,60.88
FLASH_CS
  Top 0.152: U1.1 34.25,57.88 35.38,59 41.88,59 46.38,54.5 46.38,48.75 34.25,48.75 D9.2 34.12,48.75 32.75,48.75 R5.1 32.62,48.88 21.62,48.88 21.62,47.25 U2.12
GDR  (via drill 0.3)
  Top 0.152: v78.62,13.25 80.38,11.5 80.88,11.5 81.12,11.75 91.62,11.75 91.88,11.5 95,11.5 95,14.75 94.38,15.38 92.62,15.38 92.62,14.75 J1.2 | 74.38,17.88 73.5,17.88 R3.1 | 74.38,17.88 75.62,17.88 75.62,19.5 75.25,19.88 68.38,19.88 68.38,16 Q3.1 | 74.38,17.88 v74.5,17.75
  Bottom 0.152: v78.62,13.25 74.5,17.38 v74.5,17.75
GND  (via drill 0.3)
  Top 0.3: 91.25,51.88 91.25,59.75 91.38,59.88 91.5,59.88 92,60.38 C8.2 | 91.25,51.88 v92.75,51.88 93.88,51.88 C10_SUPERCAP.1 | 91.25,51.88 85.12,51.88 85.12,49.88 U3.13 | 122.75,45 124,45 IC4.2 | 122.75,45 119.62,45 119.38,44.75 C1_BAT2.2 | 122.69,43.44 122.75,43.5 122.75,45 | 122.69,43.44 121.25,42 R1_PWRUSB.1 | 128.62,43.38 122.75,43.38 122.69,43.44 | 128.62,43.38 129.25,43.38 130.25,42.38 C3.- | 129.75,48.75 130.12,48.75 133.25,45.62 133.25,45.12 C17.2 | 129.75,48.75 128.62,48.75 128.25,49.12 C2_BAT.2 | v128.38,55.5 R2_BAT.1 | v129.75,54.12 130.38,53.5 130.88,53.5 MCP73831.2 | v129.75,50.5 129.75,48.75 | v128.62,43.62 128.62,43.38 | 138.12,55.38 137.25,56.25 136.88,56.25 136.75,56.38 U4.1 | 137.62,54.75 136.75,54.75 U4.4 136.62,54.75 133.75,54.75 133.62,54.88 C1_BAT.2 133.5,54.88 v132.75,54.12 | 138.12,55.25 137.62,54.75 | 138.12,55.25 138.62,55.25 U4.6 | 138.12,55.38 U4.9 | 138.12,55.38 138.12,55.25 | C5_USB.2 152.12,48.38 152.12,49.88 C4_USB.2 152,50 151.12,50.88 148,50.88 147.62,51.25 147.62,54 | 149.75,53 151,53 D1.2 151.12,53.12 151.38,53.38 151.75,53.38 152.62,54.25 152.62,57.75 156.38,57.75 R2-USB.2 156.5,57.75 159.62,57.75 | 149.75,53 149.38,53 149,52.62 R2-USB1.1 | 147.62,54 147.62,54.62 149.38,54.62 149.75,54.25 149.75,53 | 147.62,54 138.5,54 137.75,54.75 137.62,54.75 | C1.2 C2.2 157.38,7.12 157.38,9.12 | 157.38,9.12 157.38,9.88 SENSOR2.7 | 157.38,9.12 158.88,9.12 158.88,9.88 SENSOR2.5 158.88,10 158.88,10.62 158.25,11.25 | 158.25,11.25 156.62,11.25 156.62,12.88 SENSOR2.1 | v163,17.88 164.38,17.88 J3.1 | v158.25,11.38 158.25,11.25 | J2.A1 163.25,51 163.25,51.25 J2.B12 | J2.A1 163.25,50.88 163.25,49.25 163.75,49.25 J2.MP3 163.88,49.25 167.62,49.25 J2.MP1
  Top 0.3: 162.25,57.75 163.12,57.75 J2.A12 163.25,57.62 163.25,57.38 J2.B1 | 162.25,57.75 161.38,57.75 | 161.38,57.75 159.62,57.75 | 159.62,57.75 159.62,65 TP5.TP | 162.25,57.75 162.25,57.88 163.75,59.38 J2.MP4 163.88,59.5 167.62,59.5 J2.MP2 | v162,51 163.12,51 J2.A1 | v161.38,57.62 161.38,57.75 | RESET_BUTTON.1 47.25,108 50.62,108 RESET_BUTTON.2 50.75,108 53.12,108 53.62,107.5 C5.2 53.75,107.38 54.43,106.7 59.58,106.7 60.08,107.2 61.38,107.2 CHANGE_BUTTON.1 62.25,108 65.62,108 CHANGE_BUTTON.2 65.75,108 67.88,108 68.38,107.5 C10.2 68.62,107.5 80,107.5 87.19,100.31 | 87.19,100.31 87.88,99.62 TP4.TP | 21.12,107.88 22.25,107.88 BOOT_BUTTON.1 22.38,108 25.75,108 BOOT_BUTTON.2 | 21.12,107.88 20.62,107.88 20.12,107.38 C6.2 | 3.94,97.06 2.38,95.5 J4.G4 2.38,95.25 2.38,94.88 4.38,92.88 4.62,92.88 4.88,92.62 J4.P6 5.12,92.5 14,92.5 15.5,91 J4.G2 | 3.94,97.06 7,100.12 C9.2 | 3.94,97.06 4,97 11.62,97 13.25,98.62 D8.1 13.38,98.75 21.12,98.75 | 21.12,98.75 45,98.75 47.62,101.38 IC1.3 47.88,101.38 48.12,101.62 49.62,101.62 50,102 52.12,102 C_DELAY.2 52.25,101.88 55.88,98.25 85.12,98.25 87.19,100.31 | v21.12,107.12 21.12,107.88 | v21.12,98.88 21.12,98.75 | EPD_C2.2 92.25,20.62 93.88,20.62 EPD_C1.2 | EPD_C2.2 92.12,20.75 91.88,20.75 91.88,25.12 D3.2 92,25.12 92.12,25.12 v92.88,25.88 | 89.38,20.75 90.25,20.75 EPD_C12.2 | 89.38,20.75 88.62,20.75 88.5,20.62 EPD_C6.2 88.25,20.62 88.12,20.75 86.5,20.75 EPD_C8.2 86.5,20.62 85.38,20.62 | C7.2 84.25,23.12 84.5,22.88 87.38,22.88 89.38,20.88 89.38,20.75 | EPD_C12.1 90.38,19.38 90.38,20.62 EPD_C12.2 | EPD_C2.2 91.75,20.75 91.62,20.62 90.5,20.62 EPD_C12.2
  Top 0.3: v75,19.25 73.5,19.25 R3.2 | v85.12,15.62 85.12,14.75 J1.17 | 85.38,20.62 v85.38,21.5 | 85.38,20.62 84.88,20.62 EPD_C7.2 84.75,20.75 83,20.75 EPD_C10.2 82.88,20.62 81.25,20.62 EPD_C11.2 81,20.62 80.38,20 78.12,20 77.38,20.75 D6.1 77.25,20.75 76.5,20.75 v76.25,20.5 76.12,20.5 76,20.38 68.25,20.38 67.62,19.75 | 89.94,13.81 89.62,14.12 89.62,14.62 J1.8 | 89.94,13.81 90.62,13.12 93.12,13.12 94,12.25 J1.MP1 | SJ1.1 66.75,11.62 67,11.62 R2.1 68.12,14.62 | 80.62,14 80.62,14.5 81.38,14.5 81.5,14.62 J1.24 | 80.62,14 80.62,12.25 J1.MP2 80.75,12.38 88.5,12.38 89.94,13.81 | 71.75,14.62 71.75,15.62 EPD_C9.2 | 71.75,14.62 71.75,14 | 71.75,14 71.75,13.88 71,13.12 70,13.12 EPD_C5.2 | 71.75,14 80.62,14 | 71.75,14.62 68.12,14.62 | 67.62,19.75 67.62,14.75 68.12,14.75 68.12,14.62 | J4.G3 7.5,82.25 | 7.5,82.25 12.5,82.25 15.5,85.25 J4.G1 15.62,85.38 v16.75,86.5 | D9.1 34.25,50.25 34.5,50.5 39.62,50.5 42.88,53.75 42.88,55.88 38.12,55.88 U1.9 38,55.88 37,54.88 35,54.88 34.25,54.12 U1.4 34.12,54.12 14.62,54.12 U2.29_8 | D11.1 56.88,40.75 55.12,40.75 D12.1 55,40.75 52.5,40.75 D10.1 52.38,40.75 51,42.12 42.62,42.12 | U2.29_3 12.12,55.75 13.25,55.75 U2.29_6 13.38,55.75 14.5,55.75 U2.29_9 14.5,55.62 14.5,54.5 U2.29_8 | U2.29_1 12,53.25 12,54.38 U2.29_2 | U2.29_4 13.25,53.25 12.12,53.25 U2.29_1 | U2.29_4 13.38,53.25 14.5,53.25 U2.29_7 14.5,53.38 14.5,54.38 U2.29_8 | U2.29_5 13.25,54.38 13.25,53.38 U2.29_4 | 7.62,53.12 7.62,47.25 U2.1 7.62,47.12 7.62,46.62 12.12,42.12 42.62,42.12 | 7.62,53.12 11.88,53.12 U2.29_1 | 7.62,53.12 7.62,64.62 U2.28 7.5,64.75 7.5,82.25 | 42.62,42.12 42.62,28.62 47.5,23.75 63.5,23.75 67.5,19.75 67.62,19.75
  Bottom 0.3: v129.75,54.12 v128.38,55.5 | v129.75,54.12 129.75,51.88 | 129.75,51.88 v129.75,50.5 129.75,50.38 129.12,49.75 129.12,44.12 v128.62,43.62 | 129.75,51.88 v92.75,51.88 92.88,51.75 v92.88,25.88 | v158.25,11.38 158.25,13.12 v163,17.88 163,18 162,19 v162,51 161.38,51.62 v161.38,57.62 | v132.75,54.12 v129.75,54.12 | v21.12,107.12 v21.12,98.88 21.12,98.75 16.75,94.38 v16.75,86.5 | v76.25,20.5 v75,19.25 | v85.12,15.62 85.38,15.88 v85.38,21.5
GPIO8
  Top 0.152: R1.1 19,44.25 19,47.12 U2.10
I2C_PW  (via drill 0.3)
  Top 0.152: 157.12,5.75 158.25,5.75 C1.1 158.38,5.75 159.5,5.75 R1_PINH.2 | 157.12,5.75 155.88,7 R2_PINH.2 155.88,7.12 156.38,7.62 156.5,7.62 156.5,9.88 SENSOR2.8 156.62,10 156.62,10.38 157,10.75 | 157.12,5.75 C2.1 157,5.62 156.5,5.12 155.25,5.12 128.75,31.62 89.5,31.62 v85.88,35.25 | 157,10.75 158.12,10.75 158.12,10 SENSOR2.6 | 157,10.75 156,10.75 156,13.38 156.25,13.62 157.25,13.62 157.25,13 SENSOR2.2 | v22.12,66 21.62,66 21.62,64.75 U2.17
  Bottom 0.152: v22.12,66 29.62,58.5 29.62,44.12 38.5,35.25 v85.88,35.25
INT_RTC  (via drill 0.3)
  Top 0.152: 86.88,59.25 86.38,59.25 U3.3 | 86.88,59.25 87,59.25 87,61.12 R1_PINH1.1 | v45.75,49.5 16.5,49.5 16.5,47.25 U2.8 | 86.88,59.25 v85.12,57.5 | v83.38,99 83.88,99 84.62,99.75 TP15.TP
  Bottom 0.152: v45.75,49.5 53.75,57.5 83.38,57.5 | v85.12,57.5 83.38,57.5 | 83.38,57.5 v83.38,99
IO/BOOT  (via drill 0.3)
  Top 0.152: C6.1 20.12,108.75 20.75,109.38 22.25,109.38 BOOT_BUTTON.4 22.38,109.5 25.75,109.5 BOOT_BUTTON.3 25.88,109.38 26.12,109.38 26.85,108.65 | 26.85,108.65 27.4,108.1 27.5,108 27.62,107.88 27.7,107.88 28.28,107.88 28.75,107.39 31.11,107.39 v32,106.5 | v24.12,73.75 24.12,64.75 U2.15 | 26.85,108.65 27.12,108.65 R_BOOT.2
  Bottom 0.152: v24.12,73.75 32,81.62 v32,106.5
IO/CHANGE  (via drill 0.3)
  Top 0.152: C10.1 68.38,108.88 67.75,109.5 65.75,109.5 CHANGE_BUTTON.3 65.62,109.5 62.25,109.5 CHANGE_BUTTON.4 62.12,109.5 59.5,109.5 58.88,108.88 58.38,108.88 58.25,108.75 | v50,100.5 19.25,69.75 14,69.75 14,64.75 U2.23 | 58.25,108.75 v57.75,108.25 | 58.25,108.75 58.75,108.75 58.8,108.8 R_CHANGE.2
  Bottom 0.152: v57.75,108.25 v50,100.5
MISO  (via drill 0.3)
  Top 0.152: J4.P7 5.25,93.62 5.62,93.25 14.25,93.25 15.38,92.12 27.75,92.12 31,88.88 TP6.TP 31.12,88.75 33.25,86.62 33.25,84.25 22.75,84.25 8.88,70.38 8.88,64.75 U2.27 8.88,64.62 8.88,60.38 10,59.25 31.5,59.25 34.12,56.62 U1.2 34.25,56.62 34.38,56.62 v35,57.25 | R8.1 55.25,37.5 55.25,39.12 55.12,39.12 D12.2 55,39.25 v53.88,39.25
  Bottom 0.152: v53.88,39.25 51.12,39.25 51.12,41.38 35.25,57.25 v35,57.25
MOSI  (via drill 0.3)
  Top 0.152: v86.5,15.62 86.5,14.75 J1.14 | 57,37.5 56.62,37.5 R7.1 57,37.5 | 57,37.5 v84.5,37.5 | 57,37.5 57,39.12 D11.2 56.88,39.25 56.12,40 v53.38,40 | J4.P3 27.75,89.25 31,86 TP7.TP 31.12,85.88 32.12,84.88 v32.62,84.88 | U1.5 41.88,54 38.88,51 v32.88,51 17.5,51 15.25,48.75 15.25,47.25 U2.7
  Bottom 0.152: v86.5,15.62 86.5,35.5 v84.5,37.5 | v32.62,84.88 32.88,84.62 32.88,60.5 | v32.88,51 32.88,60.5 | 32.88,60.5 v53.38,40
N$1
  Top 0.152: R2-USB.1 156.5,56.5 157,56 163.12,56 J2.B5
N$3
  Top 0.152: R2-USB1.2 148.12,53.12 148.12,51.38 160.12,51.38 161.75,53 163.12,53 J2.A5
N$4
  Top 0.152: 124.88,44.62 124.62,44.38 124.38,44.38 124.12,44.12 IC4.3 | 124.88,44.62 124.88,45.88 124.12,45.88 IC4.1 124,46 121.25,46 121,46.25 D2.1 | Q1.2 135.5,50 135.5,46 133.38,43.88 C17.1 133.25,43.88 129.25,43.88 128.5,44.62 124.88,44.62
N$5
  Top 0.152: R1_BAT.1 125.25,52.38 125.88,51.75 130.25,51.75 130.88,52.38 MCP73831.1
N$6
  Top 0.152: CHG_LED.C 125.25,54.25 126.38,53.12 126.38,52.5 R1_BAT.2
N$7
  Top 0.152: D4.2 95.38,28.88 96.12,28.88 C4.1 97,29.62 111.88,29.62 111.88,21 110.38,19.5 101,19.5 95.38,25.12 D3.1
N$8  (via drill 0.3)
  Top 0.152: v87.62,13.12 84.62,13.12 84.62,14.62 J1.18 | v89.62,21.62 v88.38,22.88 | v89.38,20 88.75,19.38 88.5,19.38 EPD_C6.1
  Bottom 0.152: v87.62,13.12 87.62,15.25 87.25,15.62 87.25,18.88 88.38,20 v88.38,22.88 | v89.62,21.62 89.38,21.38 v89.38,20
N$9  (via drill 0.3)
  Top 0.152: v124.38,53.38 123.62,53.38 122.88,54.12 R2_BAT.2 | v128,53.25 128,52.5 128.25,52.5 MCP73831.5
  Bottom 0.152: v124.38,53.38 124.75,53.38 125.38,52.75 128,52.75 v128,53.25
N$10  (via drill 0.3)
  Top 0.152: v94.12,14.75 93.38,14 91.62,14 91.62,14.62 J1.4 | v95,19.75 94.62,19.38 94,19.38 EPD_C1.1
  Bottom 0.152: v94.12,14.75 94.38,15 94.38,19.12 v95,19.75
N$11  (via drill 0.3)
  Top 0.152: v94.38,13.62 91.12,13.62 91.12,14.62 J1.5 | v95,18.88 94.75,18.62 92.88,18.62 92.25,19.25 EPD_C2.1
  Bottom 0.152: v94.38,13.62 95,14.25 v95,18.88
N$12
  Top 0.152: IC1.5 50.62,103.25 52.12,103.25 C_DELAY.1
N$13  (via drill 0.3)
  Top 0.152: v84,13.75 84,14.62 J1.19 | v83.25,21.88 83.5,22.12 v87.12,22.12 | v87.5,20 87.5,18.62 85.5,18.62 84.88,19.25 EPD_C7.1
  Bottom 0.152: v84,13.75 83.25,14.5 v83.25,21.88 | v87.12,22.12 87.5,21.75 v87.5,20
N$14  (via drill 0.3)
  Top 0.152: v83.88,15.62 83.62,15.62 83.62,14.75 J1.20 | v83.88,20 85.88,20 86.5,19.38 EPD_C8.1
  Bottom 0.152: v83.88,20 v83.88,15.62
N$15  (via drill 0.3)
  Top 0.152: v82.62,13.75 82.62,14.62 J1.22 | v82.62,17.25 82.38,17.5 80.88,17.5 80.5,17.88 80.5,18.75 82.38,18.75 82.88,19.25 EPD_C10.1
  Bottom 0.152: v82.62,17.25 v82.62,13.75
N$16  (via drill 0.3)
  Top 0.152: v89.75,51.12 91.38,51.12 91.5,51 R_CAPACITOR.2 | v89.62,61.75 89.62,62.75 88.88,62.75 D7.1
  Bottom 0.152: v89.75,51.12 89.62,51.25 v89.62,61.75
N$17
  Top 0.152: R_CAPACITOR.1 91.62,49.62 93.88,49.62 C10_SUPERCAP.2 94,49.75 95.25,49.75 95.25,56 92.12,59.12 C8.1
PREVGH  (via drill 0.3)
  Top 0.152: J1.21 83,14.75 83,15.88 v78.75,15.88 73.38,15.88 73.25,15.75 EPD_C9.1 | v82.12,31.25 82.12,32.38 D5.2
  Bottom 0.152: v82.12,31.25 78.75,27.88 v78.75,15.88
PREVGL  (via drill 0.3)
  Top 0.152: v80.88,15.25 81,15.38 82.12,15.38 82.12,14.75 J1.23 | v80.12,19.25 81.12,19.25 EPD_C11.1 | v83.5,30.88 89.75,30.88 91.75,28.88 D4.1
  Bottom 0.152: v80.88,15.25 80.12,16 v80.12,19.25 79.88,19.5 79.88,27.25 v83.5,30.88
RESE
  Top 0.152: 70.75,17.12 78.88,17.12 79.38,16.62 92.12,16.62 92.12,14.75 J1.3 | 70.75,17.12 69.62,16 Q3.2 | 70.75,17.12 70.62,17.12 70.62,18 71,18.38 71.25,18.38 72.12,19.25 R4.1
RESE'  (via drill 0.3)
  Top 0.152: SJ1.2 68.25,11.62 68.25,13.5 R2.2 68.38,13.62 68.5,13.75 70.62,13.75 v70.75,13.88 | v71.25,17.75 72,17.75 72.12,17.88 R4.2
  Bottom 0.152: v71.25,17.75 70.75,17.25 v70.75,13.88
RESET  (via drill 0.3)
  Top 0.152: C5.1 53.62,108.88 53,109.5 50.75,109.5 RESET_BUTTON.3 50.62,109.5 47.25,109.5 RESET_BUTTON.4 47.12,109.5 44.75,109.5 44.58,109.33 44.38,109.12 | R_RESET.2 44.38,109.12 | 44.12,108.88 R_RESET.2 | 44.38,109.12 46.25,107.25 47.75,107.25 47.75,103.25 IC1.1 47.75,103.12 31.5,103.12 v31.38,103 | v10.75,48.5 10.12,48.5 10.12,47.25 U2.3 | R_RESET.2 44.38,109.12
  Bottom 0.152: v10.75,48.5 21.5,59.25 21.5,93.12 v31.38,103
RTC_RST
  Top 0.152: U2.16 22.88,64.62 22.88,63.25 81.38,63.25 85,59.62 85,59.25 U3.4
RX
  Top 0.152: U2.24 12.62,64.75 12.62,71 13.88,71 TP2.TP
SCK  (via drill 0.3)
  Top 0.152: v78.12,16.5 79,16.5 79.25,16.25 87.12,16.25 87.12,14.75 J1.13 | v78.38,28.38 77.5,29.25 51.75,29.25 | 51.75,29.25 44,29.25 TP8.TP | 51.75,29.25 51.75,36.75 R6.1 52.5,37.5 52.5,39.12 D10.2 52.38,39.25 v50.25,41.38 | 15.88,49.88 14,48 14,47.25 U2.6 | 15.88,49.88 17.62,51.62 38.25,51.62 v39.12,52.5 41.88,55.25 U1.6 | v6.5,91 5.62,91 5.25,91.38 J4.P5 | 15.88,49.88 v13.5,52.25
  Bottom 0.152: v78.12,16.5 78.38,16.75 v78.38,28.38 | v6.5,91 13.5,84 v13.5,52.25 | v39.12,52.5 v50.25,41.38
SCL  (via drill 0.3)
  Top 0.152: R2_PINH.1 155.75,5.75 155.12,6.38 155.12,14 158.12,14 158.88,13.25 158.88,13 SENSOR2.4 159,13 163.38,17.38 165.12,17.38 165.38,17.62 165.38,20.88 164.5,20.88 J3.4 164.38,21 v161.25,24.12 | v140.38,54.75 140.12,54.75 139.12,55.75 138.75,55.75 U4.7 | v87.75,53.25 84.25,53.25 76,61.5 17.75,61.5 17.75,64.62 U2.20 | v89.75,50.25 89.38,49.88 89,49.88 U3.16
  Bottom 0.152: v161.25,24.12 161.25,33.88 v140.38,54.75 140.25,54.88 140.25,56.5 134.38,62.38 88.12,62.38 88.12,52.88 | 88.12,52.88 89.12,51.88 89.12,50.88 v89.75,50.25 | 88.12,52.88 v87.75,53.25
SDA  (via drill 0.3)
  Top 0.152: 159.5,12.12 159.5,7.12 R1_PINH.1 | 159.5,12.12 158.62,12.12 158.25,12.5 158.25,12.88 SENSOR2.3 | 160.62,24.75 160.62,23.38 163.62,20.38 164,20.38 164.38,20 J3.3 | 160.62,24.75 162,24.75 165.75,21 165.75,12.12 159.5,12.12 | 88.62,48.5 94.62,48.5 103.5,57.38 137.62,57.38 138.62,56.38 U4.8 138.75,56.25 139.5,56.25 v139.62,56.12 | 88.62,48.5 87.62,49.5 U3.15 | v65.5,62.62 19,62.62 19,64.62 U2.19 | v70,58.12 79.62,48.5 88.62,48.5 | v160.62,33.62 160.62,24.75
  Bottom 0.152: v70,58.12 v65.5,62.62 | v160.62,33.62 139.62,54.62 v139.62,56.12
SRC  (via drill 0.3)
  Top 0.152: C4.2 96.88,31 96.62,31.25 86.88,31.25 85.75,32.38 D5.1 85.62,32.38 84.75,31.5 83.25,31.5 81.75,30 81.75,27.75 L1.1 79.75,27.75 v77.75,25.75 | v71.25,19.25 70.12,19.25 69,18.12 Q3.3
  Bottom 0.152: v77.75,25.75 v71.25,19.25
SS_SD  (via drill 0.3)
  Top 0.152: 10.38,98.75 9,100.12 R10.1 | 10.38,98.75 11.75,98.75 D8.2 | v11.38,52.25 11.38,47.25 U2.4 | v6.5,87.25 5.62,88.12 J4.P2 | v10.38,97.75 10.38,98.75
  Bottom 0.152: v11.38,52.25 6.5,57.12 v6.5,87.25 5.88,87.88 5.88,93.25 v10.38,97.75
TX
  Top 0.152: U2.25 11.38,64.75 TP1.TP
USB_D+  (via drill 0.3)
  Top 0.152: v138.88,57 148.12,57 151,54.12 D1.1 | v129.88,48 30.88,48 30.12,47.25 24.12,47.25 U2.14
  Bottom 0.152: v129.88,48 v138.88,57
USB_D-  (via drill 0.3)
  Top 0.152: v149.88,52.25 151,52.25 D1.3 | v32.25,63.88 v138.25,63.88 | v30.25,48.25 23.5,48.25 22.88,47.62 22.88,47.25 U2.13
  Bottom 0.152: v138.25,63.88 v149.88,52.25 | v32.25,63.88 30.25,61.88 v30.25,48.25
VBAT  (via drill 0.3)
  Top 0.3: U4.3 136.75,55.38 136.75,55.75 U4.2 136.62,55.75 135.75,55.75 | 134.06,51.69 134.5,52.12 Q1.3 | 134.06,51.69 133.62,51.25 129,51.25 128.25,50.5 C2_BAT.1 128.12,50.62 122,50.62 122,56 122.88,56.88 134.25,56.88 135.38,55.75 135.75,55.75 | 134.06,51.69 131.75,54 131.25,54 131,54.25 MCP73831.3 | v137.88,58 149.5,58 156.5,65 TP3.TP | v135.75,55.88 135.75,55.75
  Bottom 0.3: v135.75,55.88 v137.88,58
VBUS  (via drill 0.3)
  Top 0.3: 120,41.12 121.75,41.12 122.5,41.88 R1_PWRUSB.2 | 120,41.12 119.5,41.12 119.5,42.75 120.88,44.12 D2.2 | 120,41.12 120,41 126,35 TP14.TP 126,35.12 136.25,45.38 136.25,50.88 | CHG_LED.A 126.75,54.38 128.25,54.38 MCP73831.4 128.38,54.38 129,55 132.38,55 132.56,55.19 | 132.56,55.19 133.5,56.12 C1_BAT.1 | v154.75,53.12 153.62,53.12 D1.5 | v154.25,50.75 153.5,50 C4_USB.1 153.5,49.88 153.5,48.38 C5_USB.1 153.38,48.25 149.62,44.5 149.38,44.5 PFMP.050.1.2 149.25,44.5 142.88,50.88 137,50.88 | 137,50.88 136.25,50.88 | 136.25,50.88 134.38,50.88 133.62,50.12 Q1.1 | v134,54 137,51 137,50.88 | v132.62,55.12 132.56,55.19
  Bottom 0.3: v154.75,53.12 154.25,52.62 v154.25,50.75 | v132.62,55.12 134,55.12 v134,54
VUSB  (via drill 0.3)
  Top 0.3: J2.A9 163.25,56.75 163.25,56.62 J2.B4 163.12,56.62 v162.12,56.62 | J2.B9 163.25,52 163.25,51.88 J2.A4 163.12,51.75 162.12,51.75 | 162.12,51.75 161.12,51.75 153.88,44.5 PFMP.050.1.1 | v162.12,51.88 162.12,51.75
  Bottom 0.3: v162.12,51.88 v162.12,56.62